# EAGLE board Ham-Dip (EAGLE 8.2.1)
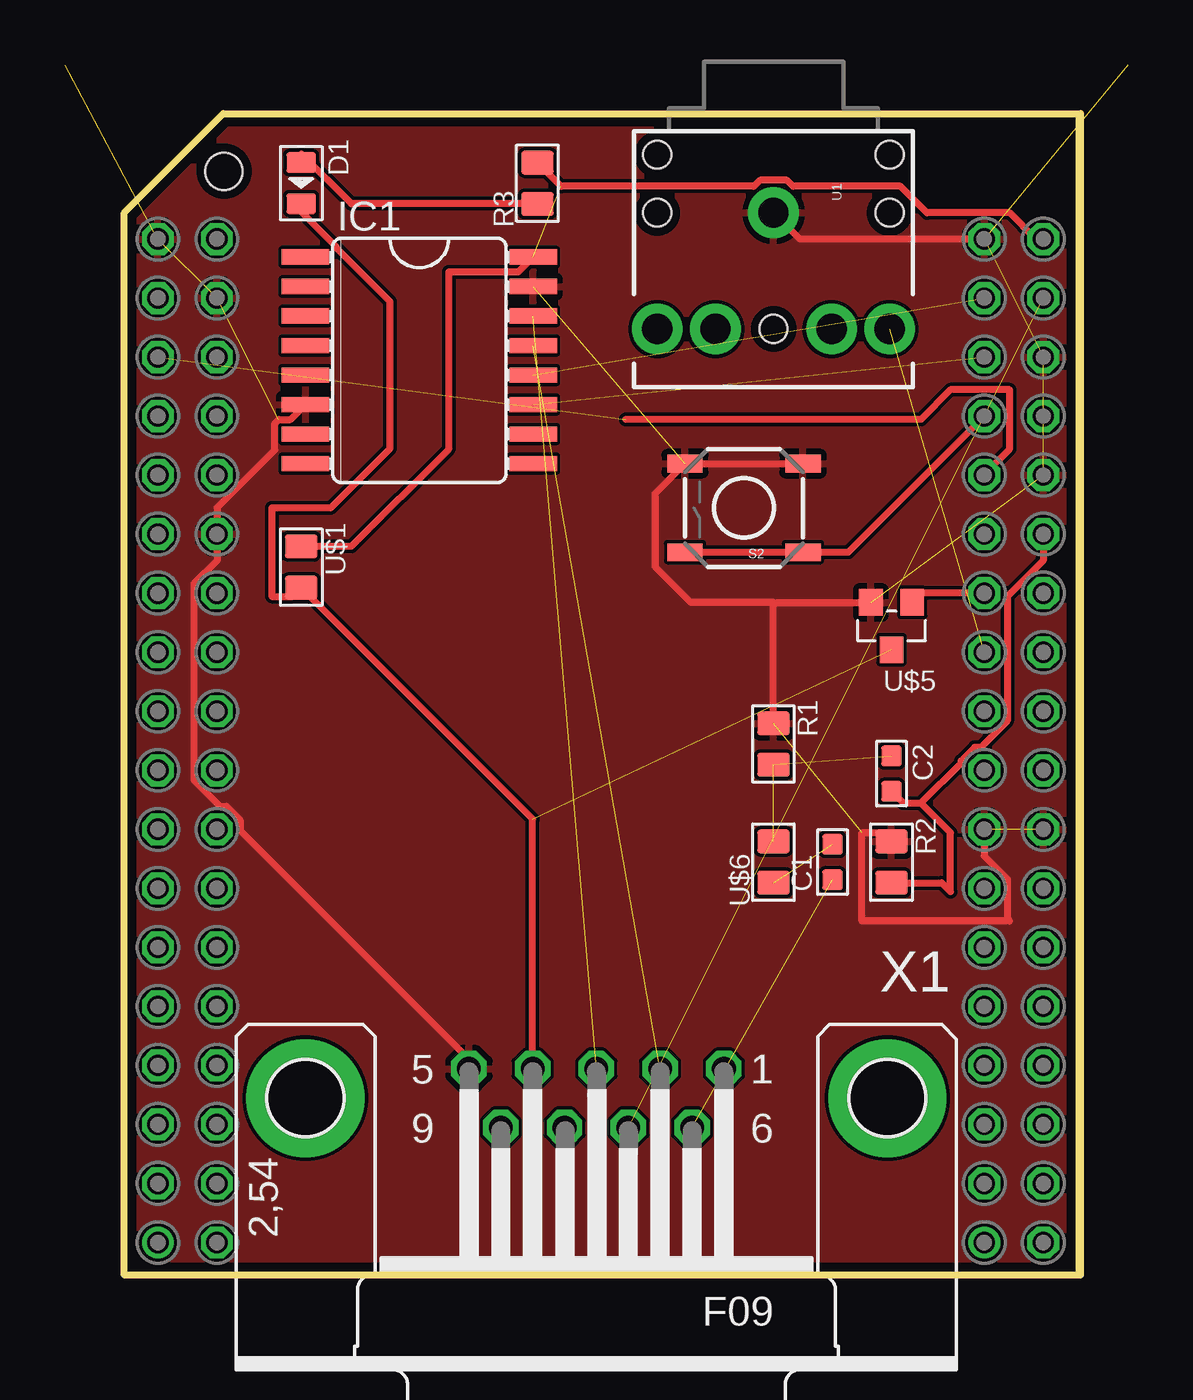
[diagram p0: board, top side]
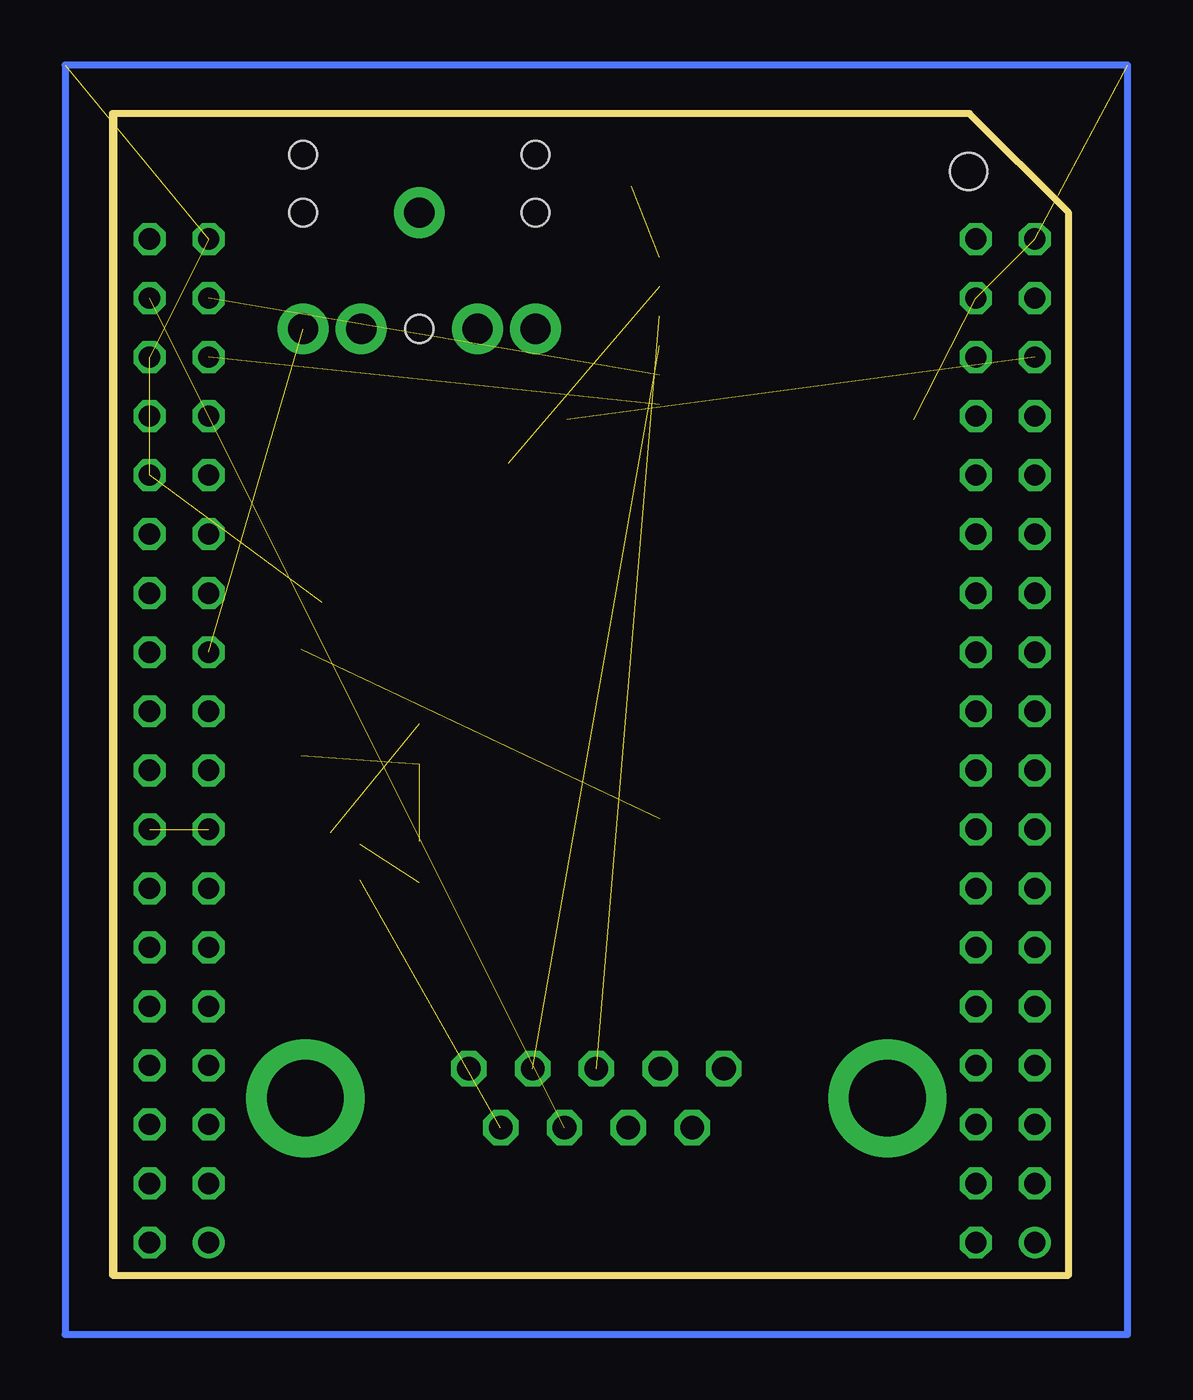
[diagram p1: board, bottom side, seen from below]

Size 41.15 x 50 mm. Coordinates in mm from the lower left corner, seen from the top.
Outline: 0,0 0,45.72 4.27,49.99 41.15,49.99 41.15,0 0,0
Copper layers (1*16): Top 0.0356mm / dielectric 1.5011mm / Bottom 0.0356mm
Design rules "LaenPCBOrder": minimum track width 6mil, minimum drill 13mil, track to track 6mil, track to pad 6mil, pad to pad 6mil, via to via 6mil, smd to smd 6mil, copper to edge 15mil, drill to drill 6mil, minimum pad ring 7mil, minimum via ring 7mil, stop-mask expansion 4mil, vias tented up to drill 0mil, thermal gap 10mil

## Footprints (pad centres in the part's own frame; a part is rotated, then mirrored left to right if it is on the bottom)
C0603 = smd 0.889 x 0.889: 1 0,0.762; 2 0,-0.762
LED-0805 = smd 0.889 x 1.27: + -0.889,0; - 0.889,0
SO16L = smd 0.66 x 2.032: 1 -4.445,-4.902; 2 -3.175,-4.902; 3 -1.905,-4.902; 4 -0.635,-4.902; 5 0.635,-4.902; 6 1.905,-4.902; 7 3.175,-4.902; 8 4.445,-4.902; 9 4.445,4.902; 10 3.175,4.902; 11 1.905,4.902; 12 0.635,4.902; 13 -0.635,4.902; 14 -1.905,4.902; 15 -3.175,4.902; 16 -4.445,4.902
R0805 = smd 1.397 x 1.016: 1 0,0.889; 2 0,-0.889
TACTILE_SWITCH_SMD = smd 1.524 x 0.762: 1 -2.54,1.905; 2 2.54,1.905; 3 -2.54,-1.905; 4 2.54,-1.905
AUDIO-JACK = drill 1.3 pad 2.184: RING 5,5; RSH 5,2.5; SLEEVE 0,0; TIP 5,-5; TSH 5,-2.5 | hole 1.2: 0,5; -2.5,5; -2.5,-5; 0,-5; 5,0
2X18_FANCY_EDGE_CHIP_TH = drill 0.914: 1 1.45,1.41; 37 37.01,1.41 | drill 0.914 octagon: 2 3.99,1.41; 3 1.45,3.95; 4 3.99,3.95; 5 1.45,6.49; 6 3.99,6.49; 7 1.45,9.03; 8 3.99,9.03; 9 1.45,11.57; 10 3.99,11.57; 11 1.45,14.11; 12 3.99,14.11; 13 1.45,16.65; 14 3.99,16.65; 15 1.45,19.19; 16 3.99,19.19; 17 1.45,21.73; 18 3.99,21.73; 19 1.45,24.27; 20 3.99,24.27; 21 1.45,26.81; 22 3.99,26.81; 23 1.45,29.35; 24 3.99,29.35; 25 1.45,31.89; 26 3.99,31.89; 27 1.45,34.43; 28 3.99,34.43; 29 1.45,36.97; 30 3.99,36.97; 31 1.45,39.51; 32 3.99,39.51; 33 1.45,42.05; 34 3.99,42.05; 35 1.45,44.59; 36 3.99,44.59; 38 39.55,1.41; 39 37.01,3.95; 40 39.55,3.95; 41 37.01,6.49; 42 39.55,6.49; 43 37.01,9.03; 44 39.55,9.03; 45 37.01,11.57; 46 39.55,11.57; 47 37.01,14.11; 48 39.55,14.11; 49 37.01,16.65; 50 39.55,16.65; 51 37.01,19.19; 52 39.55,19.19; 53 37.01,21.73; 54 39.55,21.73; 55 37.01,24.27; 56 39.55,24.27; 57 37.01,26.81; 58 39.55,26.81; 59 37.01,29.35; 60 39.55,29.35; 61 37.01,31.89; 62 39.55,31.89; 63 37.01,34.43; 64 39.55,34.43; 65 37.01,36.97; 66 39.55,36.97; 67 37.01,39.51; 68 39.55,39.51; 69 37.01,42.05; 70 39.55,42.05; 71 37.01,44.59; 72 39.55,44.59 | hole 1.6: 4.3,47.5
SOT-23 = smd 1.016 x 1.143: 1 -0.889,-1.016; 2 0.889,-1.016; 3 0,1.016
F09HP = drill 1.016 octagon: 1 -5.486,-1.27; 2 -2.743,-1.27; 3 0,-1.27; 4 2.743,-1.27; 5 5.486,-1.27; 6 -4.115,1.27; 7 -1.372,1.27; 8 1.372,1.27; 9 4.115,1.27 | drill 3.302 pad 5.08: G1 -12.522,0; G2 12.522,0

## Placement (x,y rotation side)
C1  1uf  [C0603]  30.48,17.78 180 top
C2  1uf  [C0603]  33.02,21.59 0 top
D1  RED-0805  [LED-0805]  7.62,46.99 270 top
IC1  MAX232ECWE  [SO16L]  12.7,39.37 270 top
R1  2.2K  [R0805]  27.94,22.86 0 top
R2  2.2K  [R0805]  33.02,17.78 0 top
R3  330R  [R0805]  17.78,46.99 180 top
S2  reset  [TACTILE_SWITCH_SMD]  26.67,33.02 180 top
U1  [AUDIO-JACK]  27.94,45.72 270 top
U$1  10K  [R0805]  7.62,30.48 0 top
U$2  2X18_FANCY_CHIP  [2X18_FANCY_EDGE_CHIP_TH]  0,0 0 top
U$5  MMBT3904LT1G  [SOT-23]  33.02,27.94 180 top
U$6  10K  [R0805]  27.94,17.78 180 top
X1  [F09HP]  20.32,7.62 180 top

## Library data of the parts
C1 C2 = Seeed-Capacitor-2016; MPN: CC0603KRX7R8BB105
D1 = Seeed-LED-2016; MPN: 17-215SURC/S530-A2/TR8
IC1 = maxim; MF: MAXIM; MPN: MAX232ECWE+; OC_FARNELL: 9724435; OC_NEWARK: 67K4440
R1 R2 = Seeed-Resistor-2016; MPN: RC0805JR-072K2L
R3 = Seeed-Resistor-2016; MPN: RC0805JR-07220RL
S2 = SparkFun-Electromechanical; PROD_ID: SWCH-08247
U1 = SparkFun-Connectors
U$1 U$6 = Seeed-Resistor-2016; MPN: RC0805FR-0710KL
U$2 = JKW_CHIP
U$5 = Seeed-Transistor-2016; MPN: MMBT3904LT1G
X1 = con-subd; OC_FARNELL: unknown; OC_NEWARK: unknown

## Nets
$N$2: IC1.6 IC1.15 R1.1 R2.1 S2.3 S2.4 U1.SLEEVE U$2.26 U$2.34 U$2.35 U$2.51 U$2.52 U$2.64 U$2.68 U$2.71 U$5.2 X1.5
AUDIO-IN: C1.1 X1.6
AUDIO-OUT: U$2.70 X1.7
CW-KEY-1: U1.RING U$2.57
CW-KEY-2: U1.TIP
FEL: S2.1 S2.2 U$2.65
GPIO: X1.1
MIC-IN: C2.2 R2.2 U$2.62
N$1: D1.+ R3.1
N$3: C1.2 U$6.1
N$4: C2.1 R1.2 U$6.2
PTT: D1.- U$1.2 U$5.3 X1.4
RX: IC1.11 U$2.67
RXD: IC1.14 X1.3
TX: IC1.12 U$2.69
TXD: IC1.13 X1.2
VCC: IC1.16 R3.2 U$1.1 U$2.72
VCC3V3: U$2.31 U$2.63
VCC-1V8: U$2.29
VCC-5V: U$2.33
XIO-P0: U$2.59 U$5.1

## Tracks (layer width: path | path; a pad name or v marks a point on that pad's centre or on a via)
$N$2  (10 unrouted)
  Top 0.305: U$2.71 33.41,44.59 29.07,44.59 U1.SLEEVE | IC1.6 7.16,36.83 6.66,36.83 6.48,36.65 6.48,35.52 3.99,33.03 U$2.26 3.99,30.75 3,29.76 3,21.32 4.14,20.18 4.4,20.18 4.98,19.6 4.98,19.15 15.24,8.89 X1.5 | 27.94,28.96 U$5.2 | 27.94,28.96 24.38,28.96 22.86,30.48 22.86,33.66 S2.4 S2.3 | U$2.51 37.01,18.05 38,17.06 38,15.34 38.1,15.24 31.75,15.24 31.75,19.05 32.64,19.05 R2.1 | R1.1 27.94,28.96
  Bottom 0.305: -2.54,52.07 43.18,52.07 43.18,-2.54 -2.54,-2.54 -2.54,52.07
  pour Top: -1.27,50.8 41.91,50.8 41.91,-1.27 -1.27,-1.27
AUDIO-IN  (1 unrouted)
AUDIO-OUT  (1 unrouted)
CW-KEY-1  (1 unrouted)
FEL
  Top 0.305: S2.2 S2.1 31.16,31.11 U$2.65
MIC-IN
  Top 0.305: R2.2 35.18,16.89 35.56,16.51 35.56,19.05 34.29,20.32 | 34.29,20.32 33.53,20.32 C2.2 | 34.29,20.32 36.02,22.05 36.02,22.14 36.6,22.72 36.86,22.72 38,23.86 38,29.2 39.55,30.75 U$2.62
N$1
  Top 0.305: R3.1 9.78,46.1 7.62,48.26 D1.+
N$3  (1 unrouted)
N$4  (2 unrouted)
PTT  (1 unrouted)
  Top 0.305: D1.- 7.62,45.77 9.12,44.27 9.12,44.22 11.43,41.91 11.43,35.56 8.89,33.02 6.35,33.02 6.35,29.21 7.24,29.21 U$1.2 17.58,19.63 X1.4
RX  (1 unrouted)
RXD  (1 unrouted)
TX  (1 unrouted)
TXD  (1 unrouted)
VCC  (1 unrouted)
  Top 0.305: U$2.72 39.23,44.59 38.1,45.72 34.54,45.72 33.41,46.85 28.78,46.85 28.52,47.12 27.36,47.12 27.1,46.85 18.81,46.85 R3.2 | U$1.1 9.78,31.37 13.97,35.56 13.97,43.18 16.97,43.18 IC1.16
VCC3V3  (1 unrouted)
  Top 0.305: U$2.63 37.01,34.47 38.1,35.56 38.1,38.1 35.56,38.1 34.29,36.83 21.59,36.83
XIO-P0
  Top 0.305: U$2.59 34.3,29.35 U$5.1